# Altium PCB Sensor11.PcbDoc
Units mm, origin at the board's own origin, x right, y up, seen from the top; angles counter-clockwise.
Board outline 8.25 x 6.1 mm, 2 copper layers (Top Layer, Bottom Layer), stack 0.452 mm thick; 3 components, 4 nets, 23 pads, 0 vias.
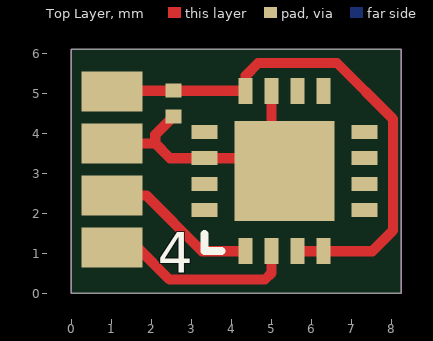
[diagram p0: Top Layer view]
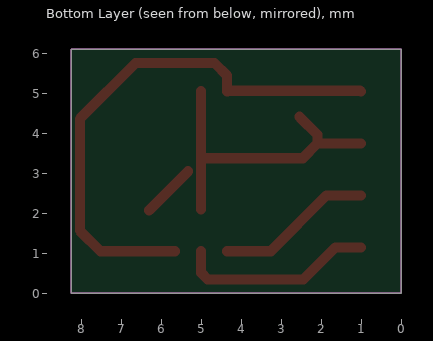
[diagram p1: Bottom Layer view, seen from below]

## Layer stack, top to bottom
Top Solder: solder mask 0.0102, Solder Resist, Dk 3.5
Top Layer: signal copper 0.0356
Dielectric1: dielectric 0.381, FR-4, Dk 4.8
Bottom Layer: signal copper 0.0356
Bottom Solder: solder mask 0.0102, Solder Resist, Dk 3.5

## Board outline
0,0 8.255,0 8.255,6.096 0,6.096

## Design rules (kind name [scope] priority, off if disabled: settings)
Clearance [All] p1: gap=0.254 ignorepadtopadclearanceinfootprint=FALSE except(0: Arc-Hole Track-Hole SMDPad-Hole THPad-Hole Via-Hole Fill-Hole Poly-Hole Region-Hole Text-Hole)
PolygonConnect [All] p1: connectstyle=Relief reliefconductorwidth=0.254 reliefentries=4 polygonreliefangle="90 Angle" airgapwidth=0.254
RoutingVias [All] p1: holewidth=0.711 width=1.27 viastyle="Through Hole" minholewidth=0.711 minwidth=1.27 maxholewidth=0.711 maxwidth=1.27
SilkToSolderMaskClearance SilkscreenOverComponentPads [IsPad] p1: minsilkscreentomaskgap=0.254 clearancetoexposedcopper=TRUE
SolderMaskExpansion [All] p1: expansion=0.102 istentingtop=FALSE
Width [All] p1: maxlimit=0.254 minlimit=0.254 preferedwidth=0.254
29 further rules are at their usual default settings.

## Components (designator, comment, footprint, x,y, rotation, side; value= is the part's Value field where it differs from the comment)
C1 "100nF CON0603" CAPC0603X06N 4.953,8.636 r90 top
J1 "SENSORCONECTOR" ConectorSMD1,3mm 1.016,1.143 r0 top
U1 "AD7422" ADT7422 5.334,3.048 r90 top

## Footprints (in the part's own frame and the unit in brackets; to place one, negate y for a bottom-side part, rotate by r counter-clockwise, add the part's x,y. Pads: shape width x height; smd on the part's side, far side on the other; paste and mask are expansions set on the pad)
ADT7422 [mm] "QFN, 16-Leads, Body 3,9x3,9mm (max), Pitch 0,65mm, IPC Medium Density"
  rect 0.65x0.35 smd: 1(-2,0.975) 2(-2,0.325) 3(-2,-0.325) 4(-2,-0.975) 9(2,-0.975) 10(2,-0.325) 11(2,0.325) 12(2,0.975)
  rect 0.35x0.65 smd: 5(-0.975,-2) 6(-0.325,-2) 7(0.325,-2) 8(0.975,-2) 13(0.975,2) 14(0.325,2) 15(-0.325,2) 16(-0.975,2)
  rect 2.5x2.5 smd: 17(0,0)
  silkscreen extent -2,1.58 -1.58,2, body extent -1.95,-1.95 1.95,1.95, height 0.8
CAPC0603X06N [mm] "Chip Capacitor, 2-Leads, Body 0,6x0,3mm, IPC Medium Density"
  rect 0.35x0.4 smd: 1(-4.225,2.4) 2(-3.575,2.4)
  body extent -4.23,2.22 -3.58,2.57, height 0.6
ConectorSMD1,3mm [mm]
  rect 1.524x1 smd: 0(0,0) 1(0,1.3) 2(0,2.6) 3(0,3.9)

## Part data
C1: library part CON0603

## Nets (pads, with @x,y where several pads share a name; then routed paths per layer and width w, separated by ;. In a path a pad name is that pad's centre, name@x,y a point inside that pad or via, vN(x,y) a via of type N, cw(c..) or ccw(c..) an arc to the next point about the centre after c; other vN are vias at no path point)
GND: C1.1 J1.2 U1.11 U1.14 U1.17 | length 9.3
  Top Layer w0.254: J1.2 2.099,3.743 ; C1.1@2.527,4.388 2.099,3.96 2.099,3.743 ; C1.1@2.55,4.411 C1.1 ; U1.17@5.009,2.087 U1.17@5.009,3.373 ; U1.11 U1.17@5.009,3.373 ; U1.17 U1.17@6.309,2.073 ; 2.099,3.743 2.469,3.373 U1.17@5.009,3.373
SCL: J1.1 U1.1 | length 3.9
  Top Layer w0.254: J1.1 1.875,2.443 3.27,1.048 U1.1
SDA: J1.0 U1.2 | length 4.9
  Top Layer w0.254: J1.0 1.651,1.143 2.452,0.342 4.843,0.342 5.009,0.508 U1.2
VCC: C1.2 J1.3 U1.3 U1.4 U1.12 | length 13.5
  Top Layer w0.254: J1.3 1.034,5.061 C1.2 4.336,5.061 U1.12@4.354,5.043 ; U1.12 4.359,5.437 4.676,5.754 6.642,5.754 8.04,4.356 8.04,1.563 7.525,1.048 U1.4 U1.3
pads on no net: U1.5 U1.6 U1.7 U1.8 U1.9 U1.10 U1.13 U1.15 U1.16

## Keep-outs
Keep-Out Layer:
  the board outline again, w0

## Silkscreen, mask and mechanical layers (free items; w line width, h text height)
Top Overlay:
  text "4" at 2.159,0.508 h1.02